# EAGLE board pasivizator3 (EAGLE 7.3.0)
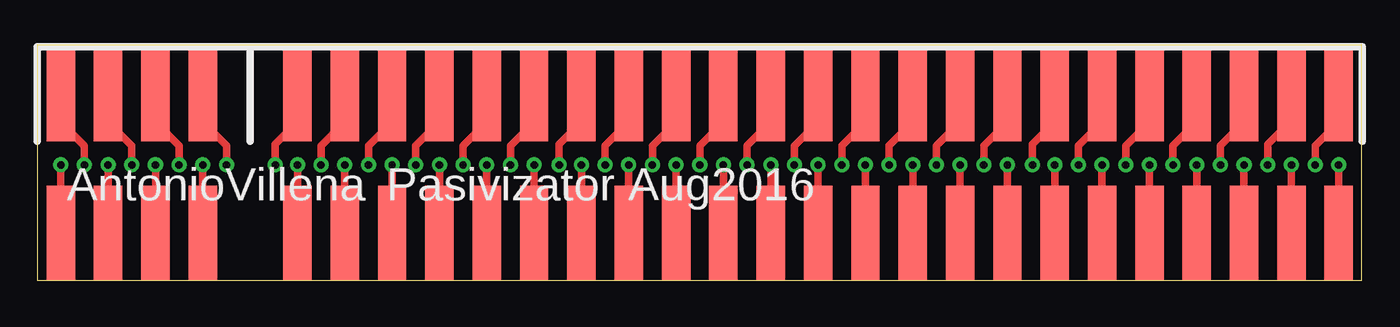
[diagram p0: board, top side]
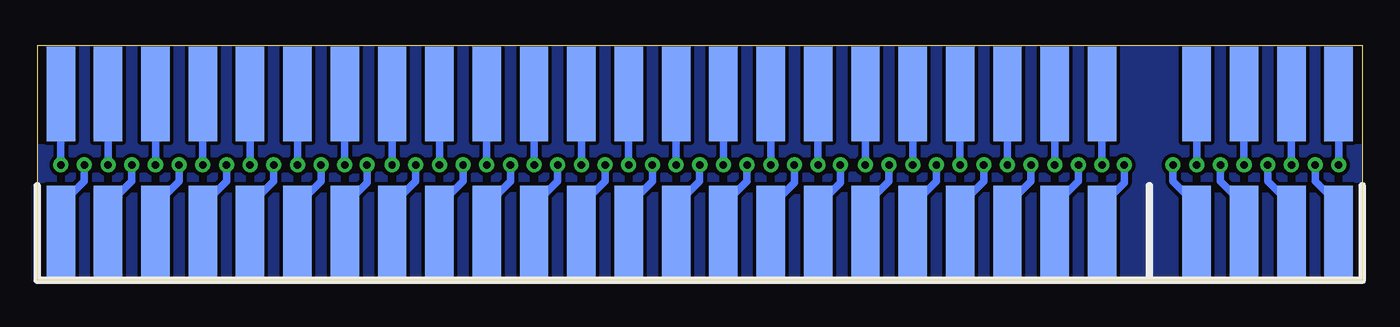
[diagram p1: board, bottom side, seen from below]

No outline drawn. Coordinates in mm, seen from the top.
Copper layers (1*16): Top 0.035mm / dielectric 1.5mm / Bottom 0.035mm
Design rules "default": minimum track width 10mil, minimum drill 24mil, track to track 8mil, track to pad 8mil, pad to pad 8mil, via to via 8mil, smd to smd 8mil, copper to edge 40mil, drill to drill 8mil, minimum pad ring 10mil, minimum via ring 8mil, stop-mask expansion 4mil, vias tented up to drill 0mil, thermal gap 10mil
Milling: 4 lines

## Footprints (pad centres in the part's own frame; a part is rotated, then mirrored left to right if it is on the bottom)
2X28_SPE2 = smd 1.524 x 5.08 bottom: A1 0,0; A2 2.54,0; A3 5.08,0; A4 7.62,0; A6 12.7,0; A7 15.24,0; A8 17.78,0; A9 20.32,0; A10 22.86,0; A11 25.4,0; A12 27.94,0; A13 30.48,0; A14 33.02,0; A15 35.56,0; A16 38.1,0; A17 40.64,0; A18 43.18,0; A19 45.72,0; A20 48.26,0; A21 50.8,0; A22 53.34,0; A23 55.88,0; A24 58.42,0; A25 60.96,0; A26 63.5,0; A27 66.04,0; A28 68.58,0 | smd 1.524 x 5.08: B1 0,0; B2 2.54,0; B3 5.08,0; B4 7.62,0; B6 12.7,0; B7 15.24,0; B8 17.78,0; B9 20.32,0; B10 22.86,0; B11 25.4,0; B12 27.94,0; B13 30.48,0; B14 33.02,0; B15 35.56,0; B16 38.1,0; B17 40.64,0; B18 43.18,0; B19 45.72,0; B20 48.26,0; B21 50.8,0; B22 53.34,0; B23 55.88,0; B24 58.42,0; B25 60.96,0; B26 63.5,0; B27 66.04,0; B28 68.58,0

## Placement (x,y rotation side)
U$1  [2X28_SPE2]  1.27,10 0 top
U$3  [2X28_SPE2]  1.27,2.54 180 bottom

## Library data of the parts
U$1 U$3 = zx_edge

## Nets
N$1: U$1.B22 U$3.B22
N$2: U$1.B20 U$3.B20
N$3: U$1.B23 U$3.B23
N$4: U$1.A26 U$3.A26
N$5: U$1.A19 U$3.A19
N$6: U$1.B15 U$3.B15
N$7: U$1.B13 U$3.B13
N$8: U$1.B17 U$3.B17
N$9: U$1.A13 U$3.A13
N$10: U$1.B24 U$3.B24
N$11: U$1.B16 U$3.B16
N$12: U$1.B14 U$3.B14
N$13: U$1.B18 U$3.B18
N$14: U$1.A20 U$3.A20
N$15: U$1.B25 U$3.B25
N$16: U$1.A25 U$3.A25
N$17: U$1.B21 U$3.B21
N$18: U$1.B19 U$3.B19
N$19: U$1.A16 U$3.A16
N$20: U$1.A3 U$3.A3
N$21: U$1.A4 U$3.A4
N$22: U$1.A9 U$3.A9
N$23: U$1.A10 U$3.A10
N$24: U$1.A11 U$3.A11
N$25: U$1.A12 U$3.A12
N$26: U$1.A24 U$3.A24
N$27: U$1.A23 U$3.A23
N$28: U$1.A22 U$3.A22
N$29: U$1.A21 U$3.A21
N$30: U$1.B26 U$3.B26
N$31: U$1.A27 U$3.A27
N$32: U$1.B27 U$3.B27
N$33: U$1.A28 U$3.A28
N$34: U$1.A2 U$3.A2
N$35: U$1.B2 U$3.B2
N$36: U$1.A1 U$3.A1
N$37: U$1.B1 U$3.B1
N$38: U$1.A8 U$3.A8
N$39: U$1.B6 U$3.B6
N$40: U$1.B7 U$3.B7
N$41: U$1.B8 U$3.B8
N$42: U$1.B11 U$3.B11
N$43: U$1.B12 U$3.B12
N$44: U$1.B10 U$3.B10
N$45: U$1.B9 U$3.B9
N$46: U$1.B3 U$3.B3
N$47: U$1.A6 U$3.A6
N$48: U$1.A7 U$3.A7
N$49: U$1.A14 U$3.A14
N$50: U$1.B4 U$3.B4
N$51: U$1.B28 U$3.B28
N$52: U$1.A18 U$3.A18
N$53: U$1.A17 U$3.A17
N$54: U$1.A15 U$3.A15

## Tracks (layer width: path | path; a pad name or v marks a point on that pad's centre or on a via)
GND
  pour Bottom: 0.24,12.38 70.88,12.38 70.88,0.24 0.24,0.24
N$1  (via drill 0.4)
  Top 0.406: U$1.B22 54.61,8.49 53.42,7.3 v53.42,6.19
  Bottom 0.406: v53.42,6.19 53.42,5.24 54.61,4.05 U$3.B22
N$2  (via drill 0.4)
  Top 0.406: U$1.B20 49.53,8.49 48.26,7.22 v48.26,6.19
  Bottom 0.406: v48.26,6.19 48.26,5.32 49.53,4.05 U$3.B20
N$3  (via drill 0.4)
  Top 0.406: U$1.B23 57.15,8.49 55.88,7.22 v55.88,6.19
  Bottom 0.406: v55.88,6.19 55.88,5.32 57.15,4.05 U$3.B23
N$4  (via drill 0.4)
  Top 0.406: v64.77,6.19 U$3.A26
  Bottom 0.406: U$1.A26 v64.77,6.19
N$5  (via drill 0.4)
  Top 0.406: v46.99,6.19 U$3.A19
  Bottom 0.406: U$1.A19 v46.99,6.19
N$6  (via drill 0.4)
  Top 0.406: U$1.B15 36.83,8.49 35.56,7.22 v35.56,6.19
  Bottom 0.406: v35.56,6.19 35.56,5.32 36.83,4.05 U$3.B15
N$7  (via drill 0.4)
  Top 0.406: U$1.B13 31.75,8.49 30.48,7.22 v30.48,6.19
  Bottom 0.406: v30.48,6.19 30.48,5.24 31.75,3.97 U$3.B13
N$8  (via drill 0.4)
  Top 0.406: U$1.B17 41.91,8.49 40.64,7.22 v40.64,6.19
  Bottom 0.406: v40.64,6.19 40.64,5.32 41.91,4.05 U$3.B17
N$9  (via drill 0.4)
  Top 0.406: v31.75,6.19 U$3.A13
  Bottom 0.406: U$1.A13 v31.75,6.19
N$10  (via drill 0.4)
  Top 0.406: U$1.B24 59.69,8.49 58.42,7.22 v58.42,6.19
  Bottom 0.406: v58.42,6.19 58.42,5.32 59.69,4.05 U$3.B24
N$11  (via drill 0.4)
  Top 0.406: U$1.B16 39.37,8.49 38.1,7.22 v38.1,6.19
  Bottom 0.406: v38.1,6.19 38.1,5.32 39.37,4.05 U$3.B16
N$12  (via drill 0.4)
  Top 0.406: U$1.B14 34.29,8.49 33.02,7.22 v33.02,6.19
  Bottom 0.406: v33.02,6.19 33.02,5.32 34.29,4.05 U$3.B14
N$13  (via drill 0.4)
  Top 0.406: U$1.B18 44.45,8.49 43.18,7.22 v43.18,6.19
  Bottom 0.406: v43.18,6.19 43.18,5.32 44.45,4.05 U$3.B18
N$14  (via drill 0.4)
  Top 0.406: v49.53,6.19 U$3.A20
  Bottom 0.406: U$1.A20 v49.53,6.19
N$15  (via drill 0.4)
  Top 0.406: U$1.B25 62.23,8.49 60.96,7.22 v60.96,6.19
  Bottom 0.406: v60.96,6.19 60.96,5.32 62.23,4.05 U$3.B25
N$16  (via drill 0.4)
  Top 0.406: v62.23,6.19 U$3.A25
  Bottom 0.406: U$1.A25 v62.23,6.19
N$17  (via drill 0.4)
  Top 0.406: U$1.B21 52.07,8.49 50.8,7.22 v50.8,6.19
  Bottom 0.406: v50.8,6.19 50.8,5.32 52.07,4.05 U$3.B21
N$18  (via drill 0.4)
  Top 0.406: U$1.B19 46.99,8.49 45.72,7.22 v45.72,6.19
  Bottom 0.406: v45.72,6.19 45.72,5.32 46.99,4.05 U$3.B19
N$19  (via drill 0.4)
  Top 0.406: v39.37,6.19 U$3.A16
  Bottom 0.406: U$1.A16 v39.37,6.19
N$20  (via drill 0.4)
  Top 0.406: v6.35,6.19 U$3.A3
  Bottom 0.406: U$1.A3 v6.35,6.19
N$21  (via drill 0.4)
  Top 0.406: v8.89,6.19 U$3.A4
  Bottom 0.406: U$1.A4 v8.89,6.19
N$22  (via drill 0.4)
  Top 0.406: v21.59,6.19 U$3.A9
  Bottom 0.406: U$1.A9 v21.59,6.19
N$23  (via drill 0.4)
  Top 0.406: v24.13,6.19 U$3.A10
  Bottom 0.406: U$1.A10 v24.13,6.19
N$24  (via drill 0.4)
  Top 0.406: v26.67,6.19 U$3.A11
  Bottom 0.406: U$1.A11 v26.67,6.19
N$25  (via drill 0.4)
  Top 0.406: v29.21,6.19 U$3.A12
  Bottom 0.406: U$1.A12 v29.21,6.19
N$26  (via drill 0.4)
  Top 0.406: v59.69,6.19 U$3.A24
  Bottom 0.406: U$1.A24 v59.69,6.19
N$27  (via drill 0.4)
  Top 0.406: v57.15,6.19 U$3.A23
  Bottom 0.406: U$1.A23 v57.15,6.19
N$28  (via drill 0.4)
  Top 0.406: v54.61,6.19 U$3.A22
  Bottom 0.406: U$1.A22 v54.61,6.19
N$29  (via drill 0.4)
  Top 0.406: v52.07,6.19 U$3.A21
  Bottom 0.406: U$1.A21 v52.07,6.19
N$30  (via drill 0.4)
  Top 0.406: U$1.B26 64.77,8.49 63.5,7.22 v63.5,6.19
  Bottom 0.406: v63.5,6.19 63.5,5.32 64.77,4.05 U$3.B26
N$31  (via drill 0.4)
  Top 0.406: v67.31,6.19 U$3.A27
  Bottom 0.406: U$1.A27 v67.31,6.19
N$32  (via drill 0.4)
  Top 0.406: U$1.B27 67.31,8.57 66.04,7.3 v66.04,6.19
  Bottom 0.406: v66.04,6.19 66.04,5.32 67.31,4.05 U$3.B27
N$33  (via drill 0.4)
  Top 0.406: v69.85,6.19 U$3.A28
  Bottom 0.406: U$1.A28 v69.85,6.19
N$34  (via drill 0.4)
  Top 0.406: v3.81,6.19 U$3.A2
  Bottom 0.406: U$1.A2 v3.81,6.19
N$35  (via drill 0.4)
  Top 0.406: U$1.B2 3.81,8.49 5.08,7.22 v5.08,6.19
  Bottom 0.406: v5.08,6.19 5.08,5.32 3.81,4.05 U$3.B2
N$36  (via drill 0.4)
  Top 0.406: v1.27,6.19 U$3.A1
  Bottom 0.406: U$1.A1 v1.27,6.19
N$37  (via drill 0.4)
  Top 0.406: U$1.B1 1.27,8.49 2.54,7.22 v2.54,6.19
  Bottom 0.406: v2.54,6.19 2.54,5.32 1.27,4.05 U$3.B1
N$38  (via drill 0.4)
  Top 0.406: v19.05,6.19 U$3.A8
  Bottom 0.406: U$1.A8 v19.05,6.19
N$39  (via drill 0.4)
  Top 0.406: U$1.B6 13.97,8.49 12.78,7.3 v12.78,6.19
  Bottom 0.406: v12.78,6.19 12.78,5.24 13.97,4.05 U$3.B6
N$40  (via drill 0.4)
  Top 0.406: U$1.B7 16.51,8.49 15.24,7.22 v15.24,6.19
  Bottom 0.406: v15.24,6.19 15.24,5.32 16.51,4.05 U$3.B7
N$41  (via drill 0.4)
  Top 0.406: U$1.B8 19.05,8.49 17.78,7.22 v17.78,6.19
  Bottom 0.406: v17.78,6.19 17.78,5.32 19.05,4.05 U$3.B8
N$42  (via drill 0.4)
  Top 0.406: U$1.B11 26.67,8.49 25.4,7.22 v25.4,6.19
  Bottom 0.406: v25.4,6.19 25.4,5.32 26.67,4.05 U$3.B11
N$43  (via drill 0.4)
  Top 0.406: U$1.B12 29.21,8.49 28.02,7.3 v28.02,6.19
  Bottom 0.406: v28.02,6.19 28.02,5.24 29.21,4.05 U$3.B12
N$44  (via drill 0.4)
  Top 0.406: U$1.B10 24.13,8.49 22.86,7.22 v22.86,6.19
  Bottom 0.406: v22.86,6.19 22.86,5.32 24.13,4.05 U$3.B10
N$45  (via drill 0.4)
  Top 0.406: U$1.B9 21.59,8.49 20.32,7.22 v20.32,6.19
  Bottom 0.406: v20.32,6.19 20.32,5.32 21.59,4.05 U$3.B9
N$46  (via drill 0.4)
  Top 0.406: U$1.B3 6.35,8.49 7.62,7.22 v7.62,6.19
  Bottom 0.406: v7.62,6.19 7.62,5.32 6.35,4.05 U$3.B3
N$47  (via drill 0.4)
  Top 0.406: v13.97,6.19 U$3.A6
  Bottom 0.406: U$1.A6 v13.97,6.19
N$48  (via drill 0.4)
  Top 0.406: v16.51,6.19 U$3.A7
  Bottom 0.406: U$1.A7 v16.51,6.19
N$49  (via drill 0.4)
  Top 0.406: v34.29,6.19 U$3.A14
  Bottom 0.406: U$1.A14 v34.29,6.19
N$50  (via drill 0.4)
  Top 0.406: U$1.B4 8.89,8.49 10.16,7.22 v10.16,6.19
  Bottom 0.406: v10.16,6.19 10.16,5.32 8.89,4.05 U$3.B4
N$51  (via drill 0.4)
  Top 0.406: U$1.B28 69.85,8.49 68.58,7.22 v68.58,6.19
  Bottom 0.406: v68.58,6.19 68.58,5.32 69.85,4.05 U$3.B28
N$52  (via drill 0.4)
  Top 0.406: v44.45,6.19 U$3.A18
  Bottom 0.406: U$1.A18 v44.45,6.19
N$53  (via drill 0.4)
  Top 0.406: v41.91,6.19 U$3.A17
  Bottom 0.406: U$1.A17 v41.91,6.19
N$54  (via drill 0.4)
  Top 0.406: v36.83,6.19 U$3.A15
  Bottom 0.406: U$1.A15 v36.83,6.19

## Text on the board
tPlace: AntonioVillena | Pasivizator Aug2016